# Allegro board KEY_20170306.brd
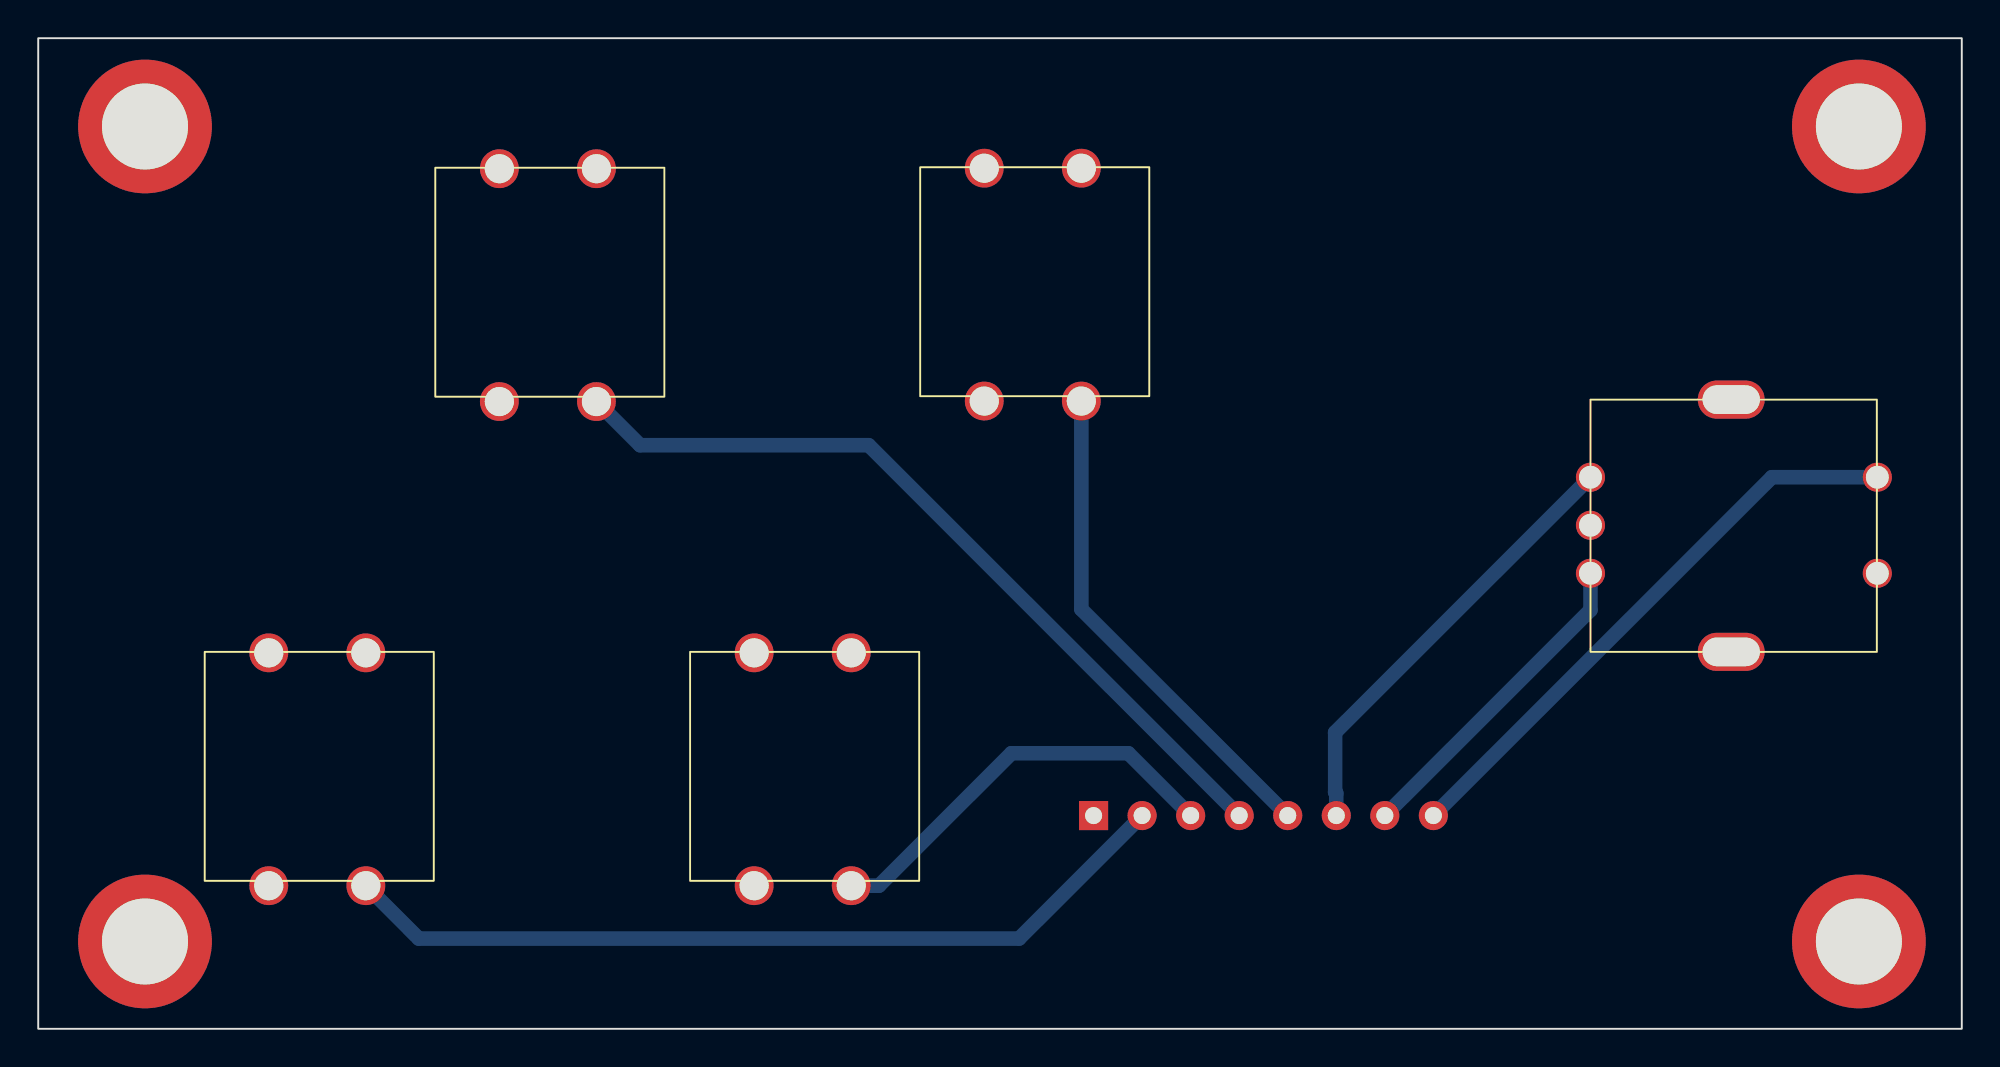
[diagram p0: board, top side]
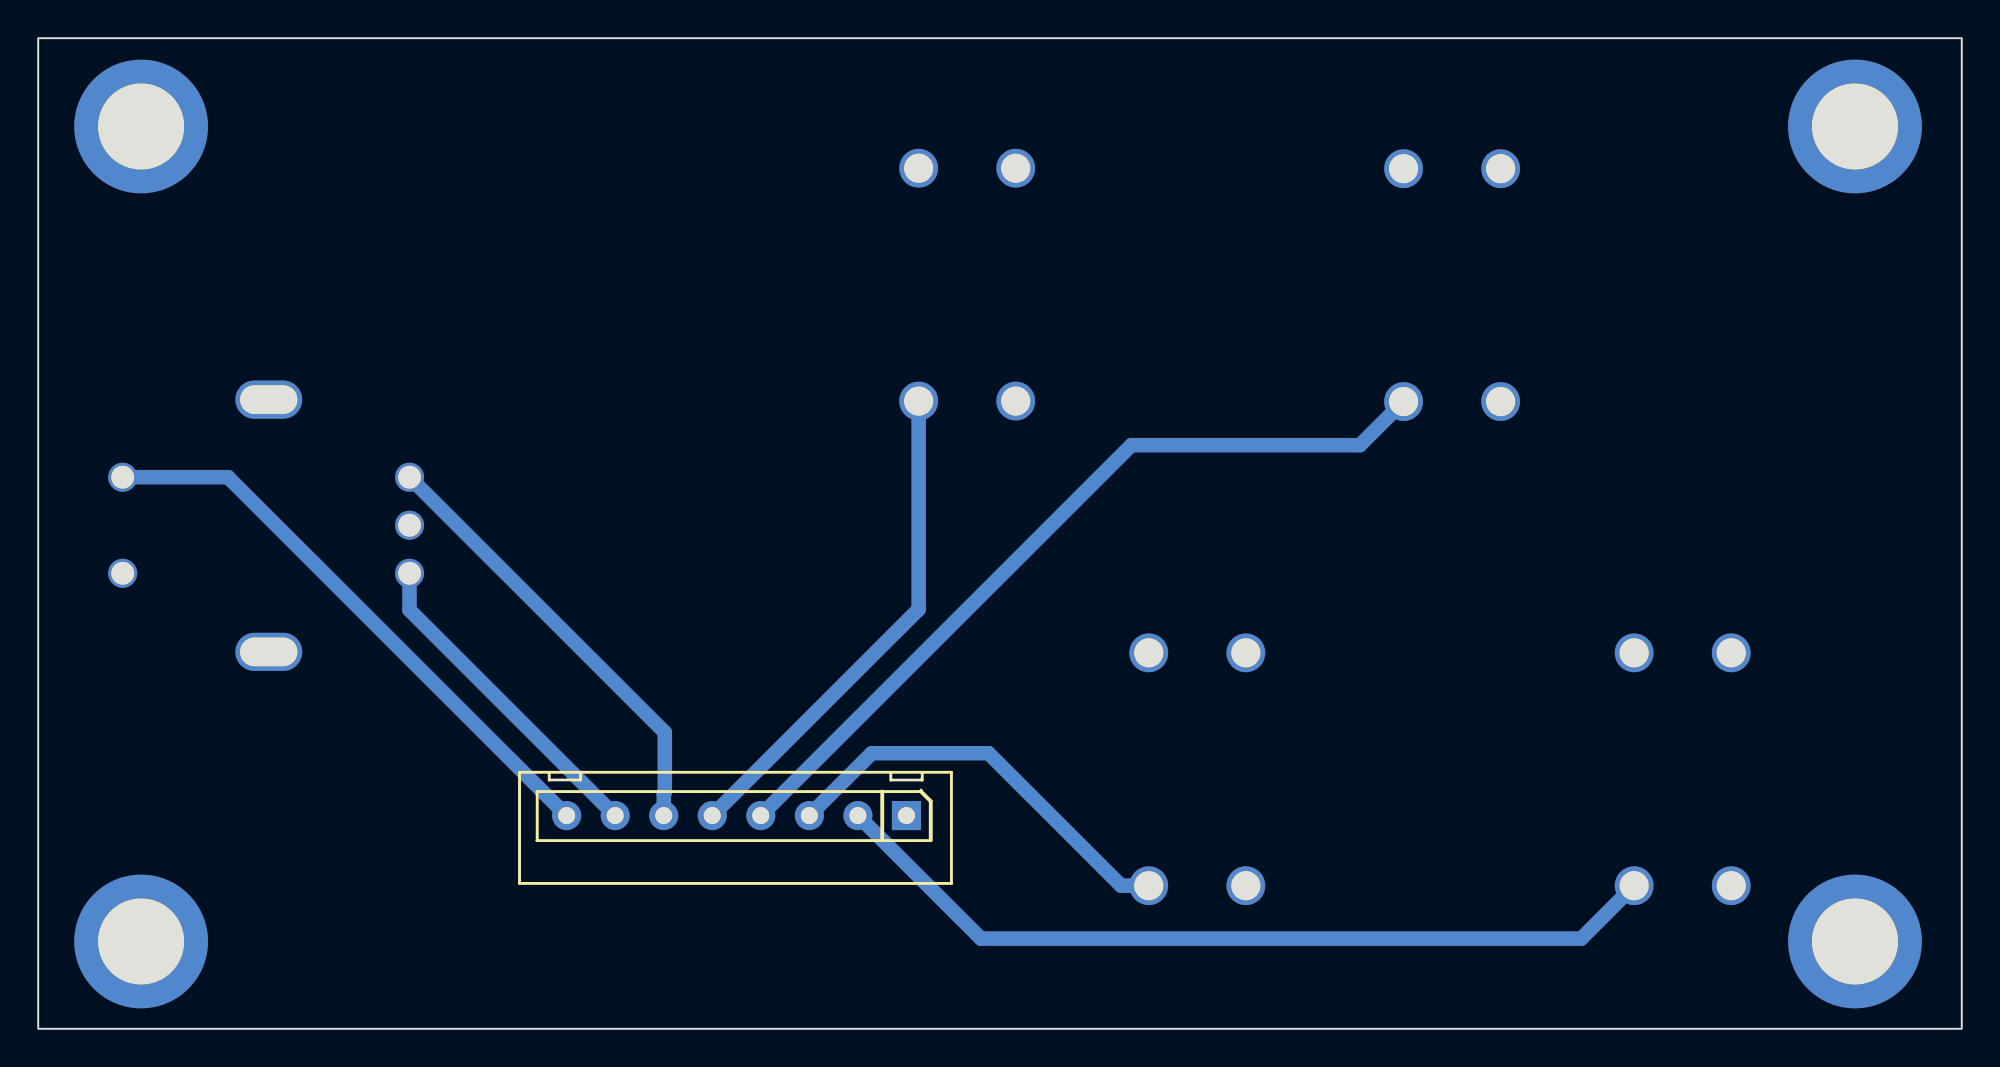
[diagram p1: board, bottom side, seen from below]

Outline 100.66 x 51.87 mm; copper layers: TOP, BOTTOM. Coordinates in mm from the lower left corner of the outline.
Outline path: rectangle 0,0 100.66,51.87

## Placement (name value [footprint] x y rotation side)
H5  NC/mechanical _pad  [HOLE_4D5MM]  5.59 47.24 0 top
H6  NC/mechanical _pad  [HOLE_4D5MM]  5.59 4.57 0 top
H7  NC/mechanical _pad  [HOLE_4D5MM]  95.28 4.57 0 top
H8  NC/mechanical _pad  [HOLE_4D5MM]  95.28 47.24 0 top
J1  HEADER 8  [XH-8A]  55.22 11.15 0 bottom
J2  HEADER 5  [SW3_2]  86.31 26.09 0 top
NOREF  -  []  50.55 40.23 90 top
NOREF#2  -  []  5.59 4.57 0 top
NOREF#3  -  []  5.59 4.57 90 top
NOREF#4  -  []  50.55 39.19 0 top
SW1  SW PUSHBUTTON_0  [SW4L]  17.14 7.49 180 top
SW2  SW PUSHBUTTON_0  [SW4L]  42.54 7.49 180 top
SW3  SW PUSHBUTTON_0  [SW4L]  29.21 32.84 180 top
SW4  SW PUSHBUTTON_0  [SW4L]  54.59 32.87 180 top

## Library data of the parts
H5-H8 = PAD
J1 = HEADER 10_0
J2 = 4 HEADER_2
SW1-SW4 = SW PUSHBUTTON_0

## Footprints (pads in the part's own frame, mm; a bottom-side part is the same pattern mirrored in y, then rotated)
HOLE_4D5MM
  round 7 hole 4.5: 1(0,0)
SW3_2
  round 1.524 hole 1.194: 1(-5.08,2.794) 2(-5.08,0.279) 3(-5.08,-2.235) 4(9.931,2.794) 5(9.931,-2.235)
  oval 3.5x2 hole 3x1.5: 6(2.286,6.858) 7(2.286,-6.35)
SW4L
  round 2.032 hole 1.524: 1(0,0) 2(0,-12.192) 3(5.08,0) 4(5.08,-12.192)
XH-8A
  rect 1.524x1.524 hole 0.889: 1(0.005,-0.013)
  round 1.524 hole 0.889: 2(2.545,-0.013) 3(5.085,-0.013) 4(7.625,-0.013) 5(10.165,-0.013) 6(12.705,-0.013) 7(15.245,-0.013) 8(17.785,-0.013)

## Nets
GND: J1.1 J2.2(G1) J2.5(G2) SW1.3 SW1.4 SW2.3 SW2.4 SW3.3 SW3.4 SW4.3 SW4.4
EC11_K: J1.8 J2.4(KEY)
KEY1: J1.2 SW1.1
KEY2: J1.3 SW2.1
KEY3: J1.4 SW3.1
KEY4: J1.5 SW4.1
N255801: J1.7 J2.3(B)
N255847: J1.6 J2.1(A)

Pads without a net: H5 1; H6 1; H7 1; H8 1; J2 6 7; SW1 2; SW2 2; SW3 2; SW4 2

## Routing (per net, layer and track width the routed paths; a pad name or vN(x,y) marks a point on that pad's centre or on a via; arc(x,y) is an arc through that point)
EC11_K: length 30.6
  BOTTOM w0.762: J1.8 90.72,28.88 J2.4
KEY1: length 44.4
  BOTTOM w0.762: SW1.1 19.91,4.72 51.33,4.72 J1.2
KEY2: length 22
  BOTTOM w0.762: J1.3 57.04,14.43 50.93,14.43 43.99,7.49 SW2.1
KEY3: length 42.6
  BOTTOM w0.762: SW3.1 31.5,30.56 43.46,30.56 J1.4
KEY4: length 26.2
  BOTTOM w0.762: SW4.1 54.59,21.97 J1.5
N255801: length 17.1
  BOTTOM w0.762: J2.3 81.23,21.93 J1.7
N255847: length 23.3
  BOTTOM w0.762: J1.6 67.93,12.33 67.87,12.39 67.87,15.52 J2.1

## Text on the board
DIMENSION: FIGURE | SIZE | 14.0 | 35.0 | 43.0 | 47.0 | 60.0 | 177.165 | 55.0 | 90.551x27.559 | DRILL CHART: TOP to BOTTOM | ALL UNITS ARE IN MILS | PLATED | NON-PLATED | QTY | 188 | 19 | 44 | 1 | 9 | 5 | 16 | 8 | 2
